# Altium PCB PCB_V2-1_接柔性传感器.PcbDoc
Units mil, origin at the board's own origin, x right, y up, seen from the top; angles counter-clockwise.
Board outline 695.03 x 435.03 mil, 2 copper layers (Top Layer, Bottom Layer); 1 components, 16 nets, 34 pads, 0 vias.
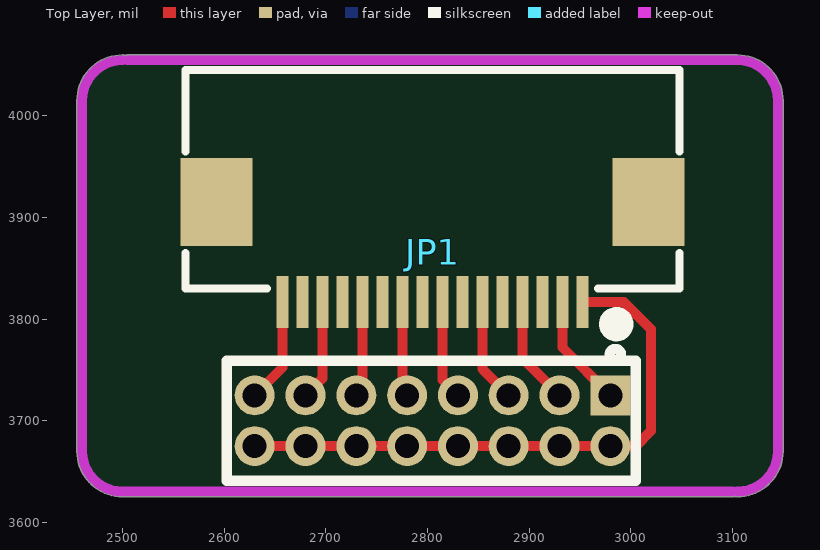
[diagram p0: Top Layer view]
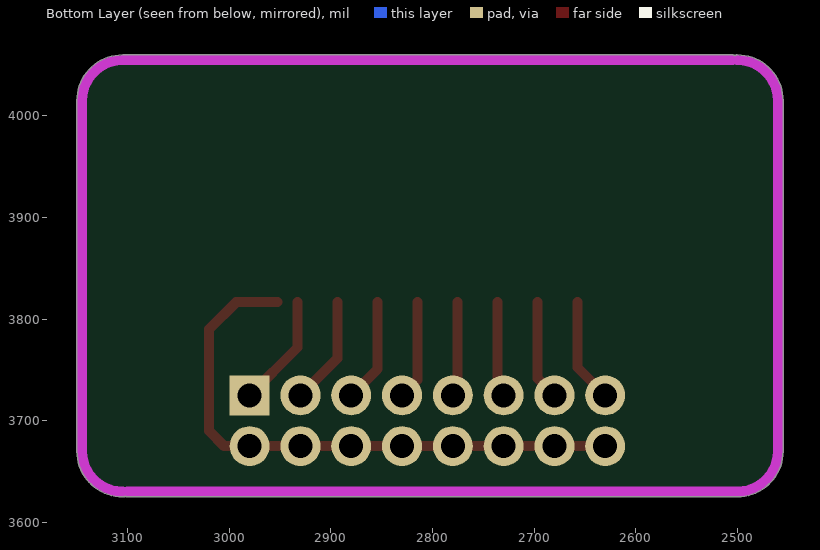
[diagram p1: Bottom Layer view, seen from below]

## Layer stack, top to bottom
Top Solder: solder mask 0.4, Solder Resist, Dk 3.5
Top Layer: signal copper 1.4
Dielectric 1: dielectric 12.6, FR-4, Dk 4.8
Bottom Layer: signal copper 1.4
Bottom Solder: solder mask 0.4, Solder Resist, Dk 3.5

## Board outline
2454.99,3670 2454.99,4015 cw(c2500,4015) 2500,4060.01 cw(c2500,4055) 2502.5,4059.35 cw(c2505,4055) 2505,4060.01 3105,4060.01 cw(c3105,4015) 3150.01,4015 3150.01,3670 cw(c3105,3670) 3105,3624.99 cw(c3105,3630) 3102.5,3625.65 cw(c3100,3630) 3100,3624.99 2500,3624.99 cw(c2500,3670)

## Design rules (kind name [scope] priority, off if disabled: settings)
Clearance [All] p1: gap=6 ignorepadtopadclearanceinfootprint=FALSE except(0: Arc-Hole Track-Hole SMDPad-Hole THPad-Hole Via-Hole Fill-Hole Poly-Hole Region-Hole Text-Hole)
HoleToHoleClearance [All] p1: gap=6 allowstackedmicrovias=TRUE
PolygonConnect [All] p1: connectstyle=Relief reliefconductorwidth=10 reliefentries=4 polygonreliefangle="90 Angle" airgapwidth=10
RoutingVias [All] p1: holewidth=28 width=50 viastyle="Through Hole" minholewidth=28 minwidth=50 maxholewidth=28 maxwidth=50
SilkToSilkClearance [All] p1: silktosilkclearance=6
SilkToSolderMaskClearance [IsPad] p1: minsilkscreentomaskgap=0 clearancetoexposedcopper=TRUE
SolderMaskExpansion [All] p1: expansion=4
Width [All] p1: maxlimit=10 minlimit=10 preferedwidth=10
27 further rules are at their usual default settings.

## Components (designator, comment, footprint, x,y, rotation, side; value= is the part's Value field where it differs from the comment)
JP1 "HDR-1X16" "FPC0.5 2H-WS-16P" 2805,3915 r180 top

## Footprints (in the part's own frame and the unit in brackets; to place one, negate y for a bottom-side part, rotate by r counter-clockwise, add the part's x,y. Pads: shape width x height; smd on the part's side, far side on the other; paste and mask are expansions set on the pad)
"FPC0.5 2H-WS-16P" [mm] "长：12.2mm，宽：5.2mm，高：2mm"
  rect 1.8x2.2 smd: 0(-5.4,0) 0(5.4,0)
  rect 0.3x1.3 smd: 1(-3.75,2.497) 2(-3.25,2.497) 3(-2.75,2.497) 4(-2.25,2.497) 5(-1.75,2.497) 6(-1.25,2.497) 7(-0.75,2.497) 8(-0.25,2.497) 9(0.25,2.497) 10(0.75,2.497) 11(1.25,2.497) 12(1.75,2.497) 13(2.25,2.497) 14(2.75,2.497) 15(3.25,2.497) 16(3.75,2.497)
  silkscreen extent -6.18,-3.3 6.18,3.23, body extent -6.1,-3.15 6.1,2.85, height 2

## Part data
JP1: library part "Header 16", "16P接插件", BOM名称=16P接插件, 学习资源=www.ooocke.com, 版权归属=源创客

## Free pads (board coordinates)
  rect 39.37x39.37 hole 23.62: 1(2980,3725)
  round 39.37 hole 23.62: 2(2980,3675) 3(2930,3725) 4(2930,3675) 5(2880,3725) 6(2880,3675) 7(2830,3725) 8(2830,3675) 9(2780,3725) 10(2780,3675) 11(2730,3725) 12(2730,3675) 13(2680,3725) 14(2680,3675) 15(2630,3725) 16(2630,3675)

## Nets (pads, with @x,y where several pads share a name; then routed paths per layer and width w, separated by ;. In a path a pad name is that pad's centre, name@x,y a point inside that pad or via, vN(x,y) a via of type N, cw(c..) or ccw(c..) an arc to the next point about the centre after c; other vN are vias at no path point)
1: JP1.1 pad.2 pad.4 pad.6 pad.8 pad.10 pad.12 pad.14 pad.16 | length 574.6
  Top Layer w10: pad.16 pad.14 pad.12 pad.10 pad.8 pad.6 pad.4 pad.2 3005,3675 3020,3690 3020,3790 2993.31,3816.69 JP1.1
2: JP1.2 pad.1 | length 111.2
  Top Layer w10: JP1.2 2932.95,3772.05 pad.1
3: JP1.3
4: JP1.4 pad.3 | length 106.8
  Top Layer w10: JP1.4 2893.58,3761.42 pad.3
5: JP1.5
6: JP1.6 pad.5 | length 102.4
  Top Layer w10: JP1.6 2854.21,3750.79 pad.5
7: JP1.7
8: JP1.8 pad.7 | length 98
  Top Layer w10: JP1.8 2814.84,3740.16 pad.7
9: JP1.9
10: JP1.10 pad.9 | length 93.6
  Top Layer w10: JP1.10 2775.47,3729.53 pad.9
11: JP1.11
12: JP1.12 pad.11 | length 94.2
  Top Layer w10: pad.11 2736.1,3731.1 JP1.12
13: JP1.13
14: JP1.14 pad.13 | length 98.6
  Top Layer w10: pad.13 2696.73,3741.73 JP1.14
15: JP1.15
16: JP1.16 pad.15 | length 103
  Top Layer w10: pad.15 2657.36,3752.36 JP1.16
pads on no net: JP1.0

## Keep-outs
Keep-Out Layer:
  lines w10: 2500,4055 ccw(c2500,4015) 2460,4015 2460,3670 ccw(c2500,3670) 2500,3630 3100,3630 ; 2505,4055 3105,4055 cw(c3105,4015) 3145,4015 3145,3670 cw(c3105,3670) 3105,3630

## Silkscreen, mask and mechanical layers (free items; w line width, h text height)
Top Overlay:
  circle w10: c2985,3765 r5.59
  lines w10: 2602.48,3640.95 3005,3640.95 3005,3759.06 2602.48,3759.06 2602.48,3640.95